# Altium PCB 2SiPM_PCB.PcbDoc (part 1 of 2)
Units mm, origin at the board's own origin, x right, y up, seen from the top; angles counter-clockwise.
Board outline 135.3 x 165.7 mm, 2 copper layers (Top Layer, Bottom Layer); 330 components, 151 nets, 821 pads, 138 vias.
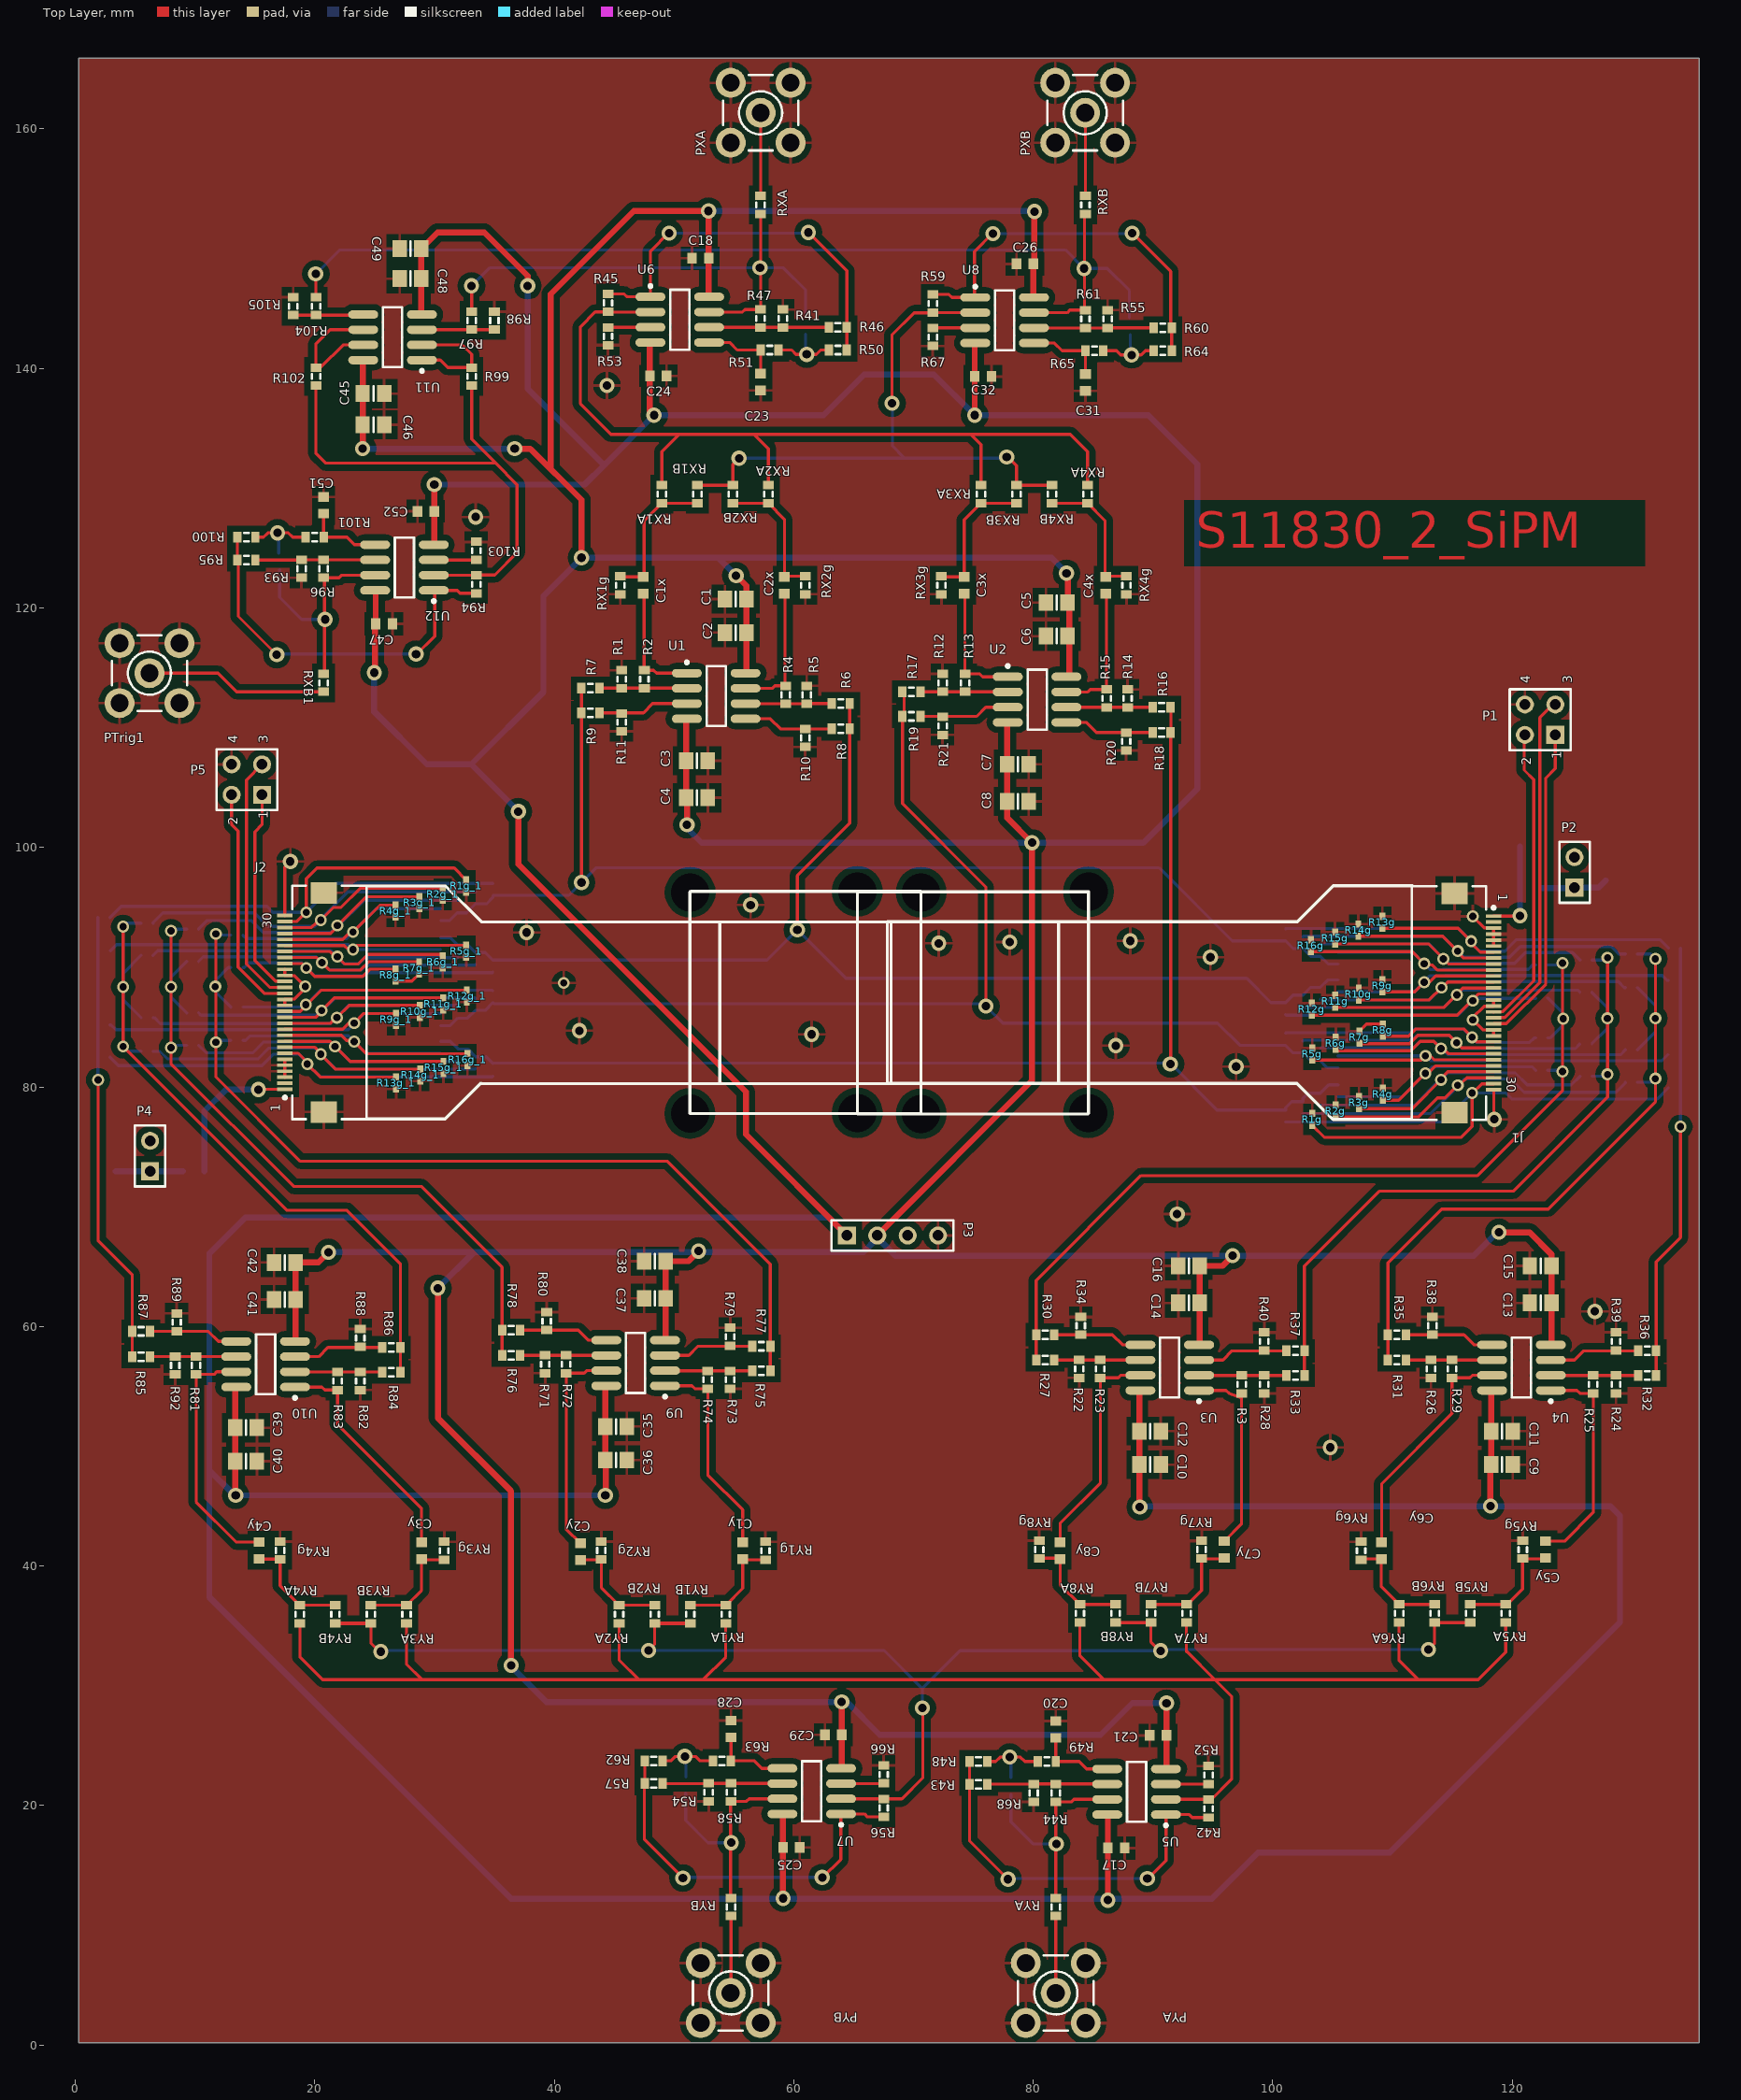
[diagram p0: Top Layer view]
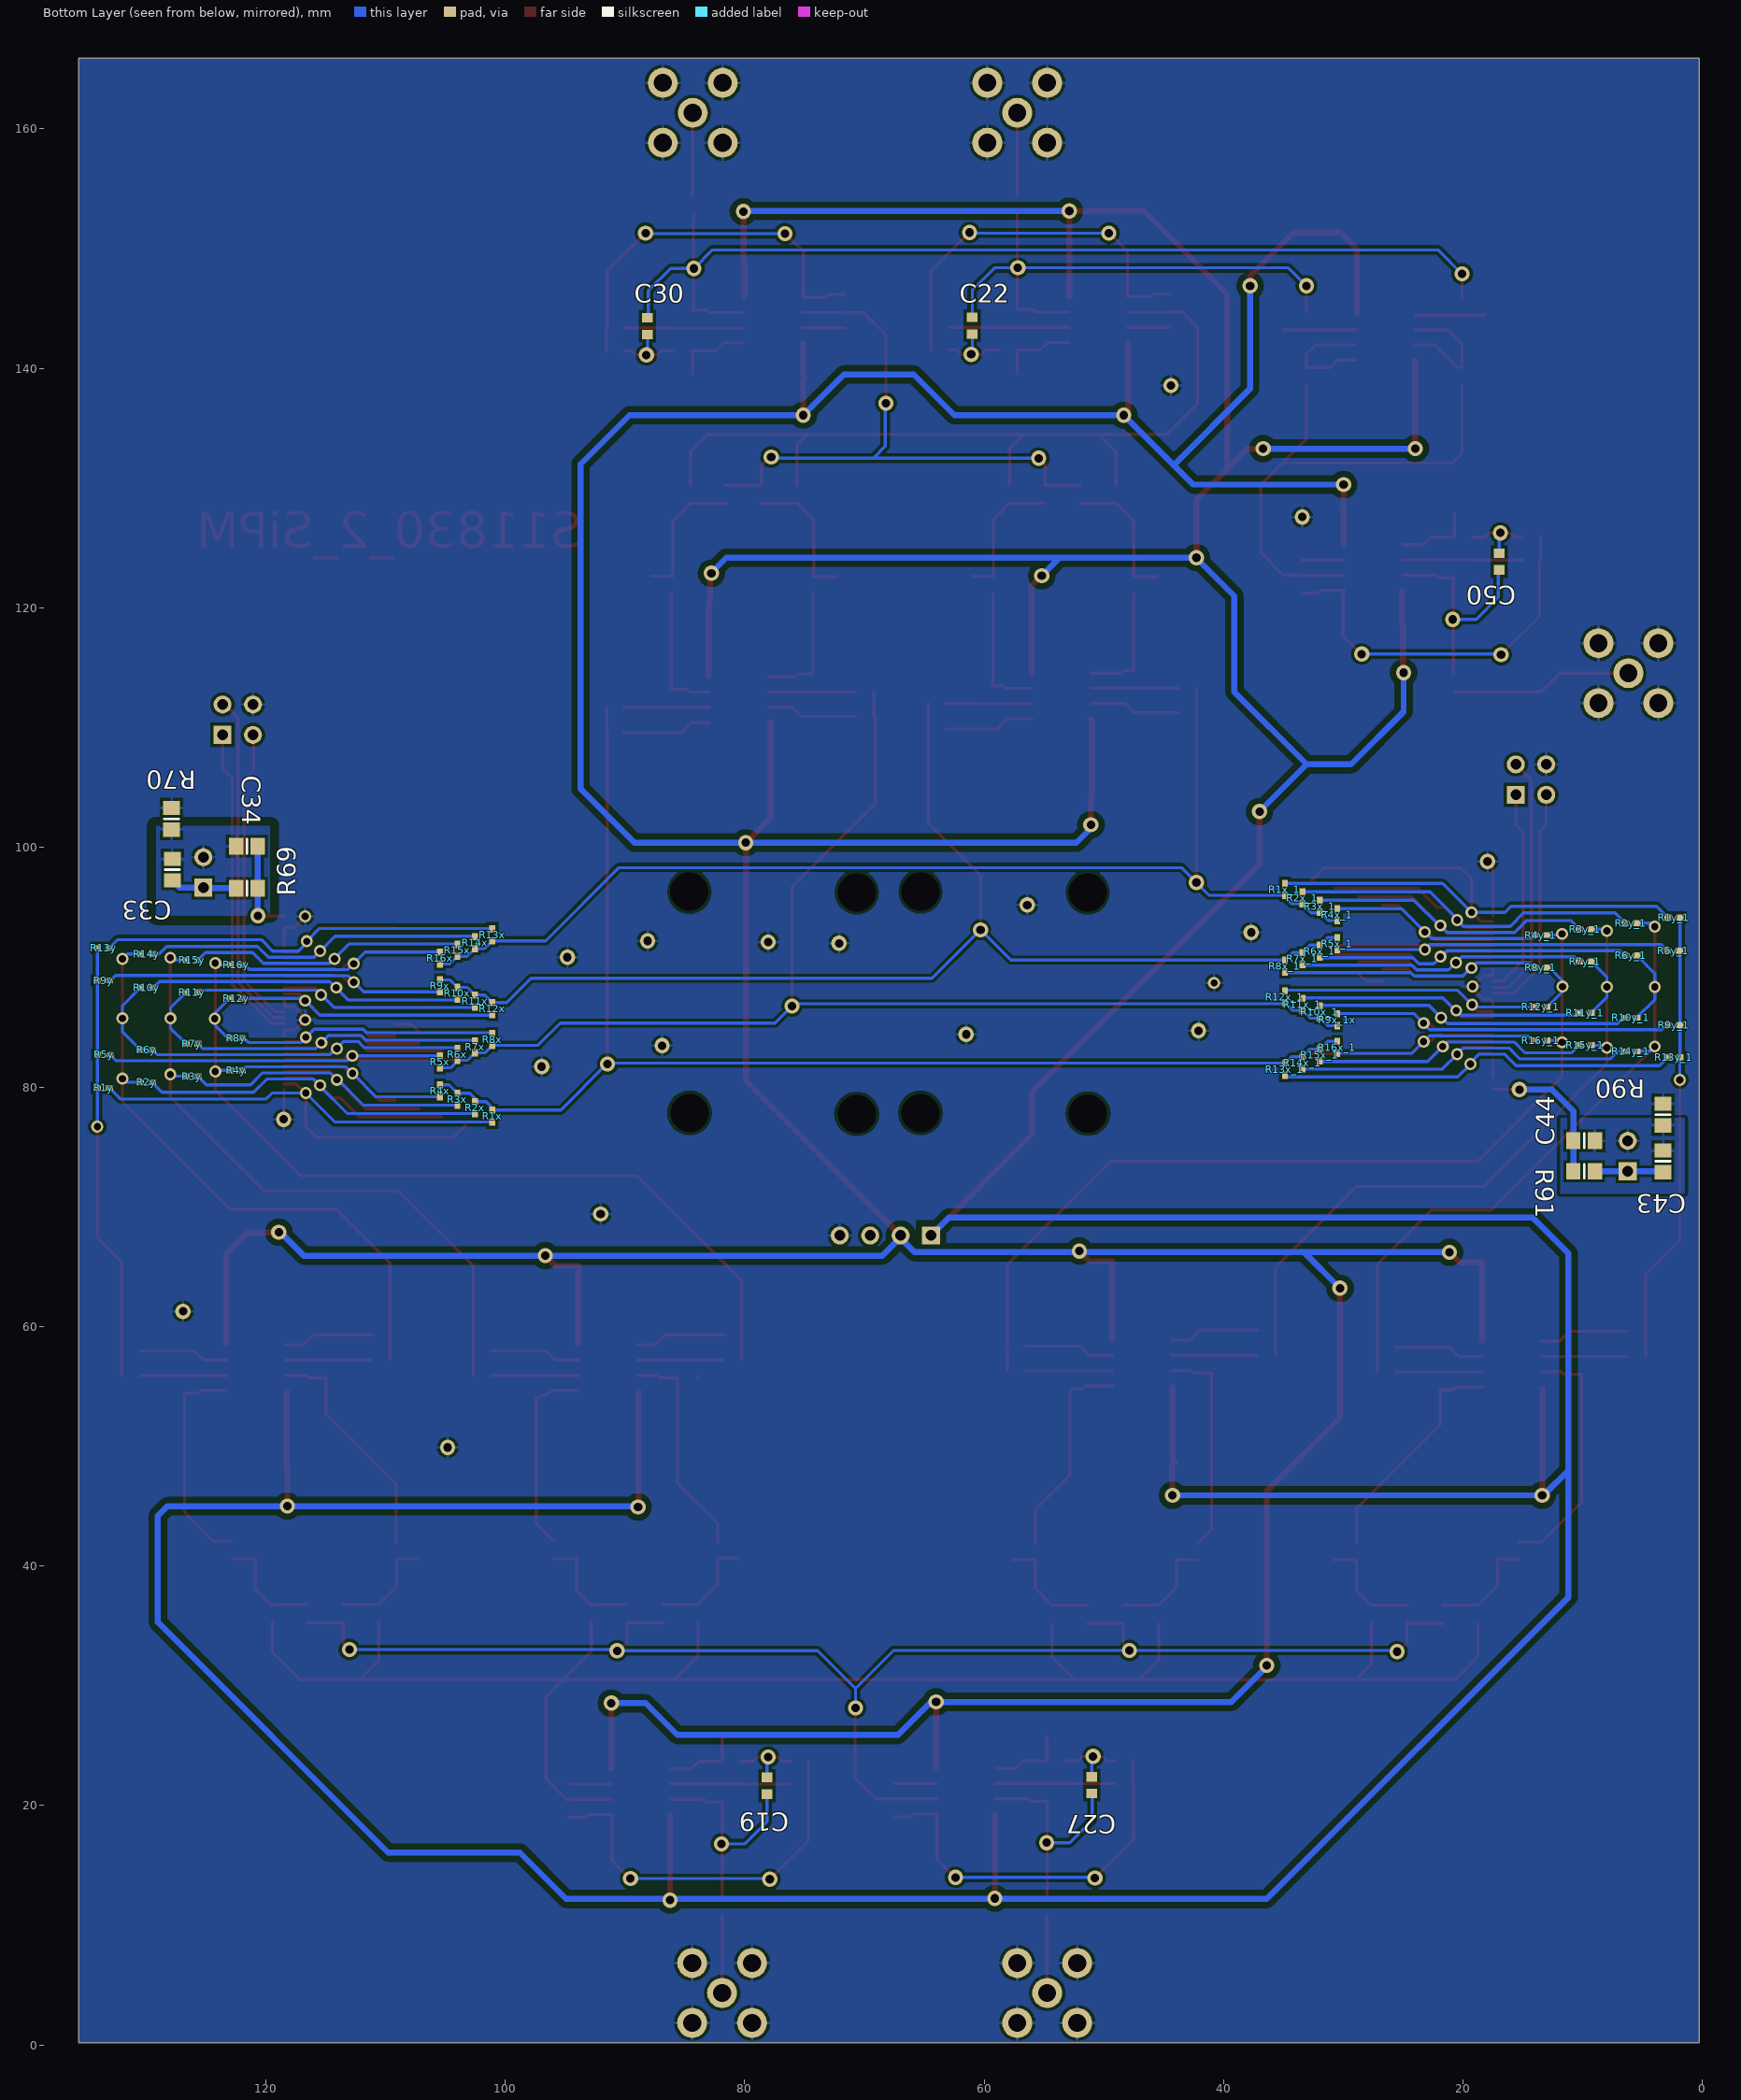
[diagram p1: Bottom Layer view, seen from below]

## Layer stack, top to bottom
Top Layer: signal copper 0.0356
Dielectric: core 0.32, FR-4, Dk 4.8
Bottom Layer: signal copper 0.0356

## Board outline
0.3,0.2 135.6,0.2 135.6,165.9 0.3,165.9

## Design rules (kind name [scope] priority, off if disabled: settings)
Clearance Clearance_7 [InNamedPolygon('gnd_top')] p1: gap=0.5
Clearance Clearance_6 [(InComponent('J2') AND (OnLayer('Bottom Layer')) OR (OnLayer('Top Layer'))OR InComponentClass('Res0402'))] p2: gap=0.2
Clearance Clearance_5 [(InNamedPolygon('gnd_top') OR InNamedPolygon('gnd_bot')) vs InPadClass('Libres')] p3: gap=1.5
Clearance Clearance_4 [InNamedPolygon('gnd_top')] p4: gap=0.5
Clearance Clearance_3 [InNamedPolygon('gnd_bot') vs (InNet('-5') OR InNet('+5')OR OnLayer('Top Layer'))] p5: gap=0.5
Clearance Clearance_2 [InNamedPolygon('70_gnd_bot') vs InNamedPolygon('gnd_bot')] p6: gap=0.75
Clearance Clearance_1 [(InComponent('J1') AND (OnLayer('Bottom Layer')) OR (OnLayer('Top Layer'))OR InComponentClass('Res0402'))] p7: gap=0.2
Clearance [All] p8: gap=0.254
HoleSize HoleSize_1 [InPadClass('Libres')] p1: absolutevalues=TRUE maxlimit=5 minlimit=0.025 maxpercent=80.000 minpercent=20.000
HoleSize [All] p2: absolutevalues=TRUE maxlimit=2.54 minlimit=0.025 maxpercent=80.000 minpercent=20.000
MinimumSolderMaskSliver MinimumSolderMaskSliver_1 [(InComponentClass('Res0402') OR InComponent('J1')OR InComponent('J2'))] p1: minsoldermaskwidth=0.05
MinimumSolderMaskSliver [All] p2: minsoldermaskwidth=0.254
PolygonConnect [All] p1: connectstyle=Relief reliefconductorwidth=0.254 reliefentries=4 polygonreliefangle="90 Angle"
RoutingVias RoutingVias_1 [InNetClass('Undefined')] p1: holewidth=0.6 width=1 viastyle="Through Hole" minholewidth=0.6 minwidth=1 maxholewidth=0.6 maxwidth=1
RoutingVias [All] p2: holewidth=0.711 width=1.27 viastyle="Through Hole" minholewidth=0.711 minwidth=1.27 maxholewidth=0.711 maxwidth=1.27
SilkscreenOverComponentPads [All] p1: minsilkscreentomaskgap=0.254
SolderMaskExpansion SolderMaskExpansion_1 [(InComponent('J1') OR InComponent('J2') OR InComponentClass('Res0402')OR IsVia)] p1: expansion=0.05
SolderMaskExpansion [All] p2: expansion=0.102
Width Width_2 [InNet(GND) And OnLayer('Top Layer')] p1: maxlimit=0.254 minlimit=0.254 preferedwidth=0.254
Width Width_1 [(InNet('-5') OR InNet('+5') OR InNet('+70') OR InNet('+70V_2') OR InNet('+70_2') OR InNet('GND')OR((InNet('+70V') AND OnLayer('Bottom Layer'))))] p2: maxlimit=0.5 minlimit=0.254 preferedwidth=0.5 bottomlayer_minwidth=0.5 minimp=50.000000 maximp=50.000000 favimp=50.000000
Width [All] p3: maxlimit=0.254 minlimit=0.254 preferedwidth=0.254
25 further rules are at their usual default settings.

## Classes and differential pairs
component class 2SiPM_3: C1y C2y C3y C4y C35 C36 C37 C38 C39 C40 C41 C42 C43 C44 J2 P4 P5 R1g_1 R1x_1 R1y_1 R2g_1 R2x_1 R2y_1 R3g_1 R3x_1 R3y_1 R4g_1 R4x_1 R4y_1 R5g_1 R5x_1 R5y_1 R6g_1 R6x_1 R6y_1 R7g_1 R7x_1 R7y_1 R8g_1 R8x_1 R8y_1 R9g_1 R9x_1x R9y_1 R10g_1 R10x_1 R10y_1 R11g_1 R11x_1 R11y_1 R12g_1 R12x_1 R12y_1 R13g_1 R13x_1 R13y_1 R14g_1 R14x_1 R14y_1 R15g_1 R15x_1 R15y_1 R16g_1 R16x_1 R16y_1 R71 R72 R73 R74 R75 R76 R77 R78 R79 R80 R81 R82 R83 R84 R85 R86 R87 R88 R89 R90 R91 R92 RY1A RY1B RY1g RY2A RY2B RY2g RY3A RY3B RY3g RY4A RY4B RY4g U9 U10
component class 2SiPM_2: C1x C2x C3x C4x C5y C6y C7y C8y C17 C18 C19 C20 C21 C22 C23 C24 C25 C26 C27 C28 C29 C30 C31 C32 C33 C34 P1 P2 P3 PXA PXB PYA PYB R41 R42 R43 R44 R45 R46 R47 R48 R49 R50 R51 R52 R53 R54 R55 R56 R57 R58 R59 R60 R61 R62 R63 R64 R65 R66 R67 R68 R69 R70 RX1A RX1B RX1g RX2A RX2B RX2g RX3A RX3B RX3g RX4A RX4B RX4g RXA RXB RY5A RY5B RY5g RY6A RY6B RY6g RY7A RY7B RY7g RY8A RY8B RY8g RYA RYB U5 U6 U7 U8
component class 2SiPM_1: C1 C2 C3 C4 C5 C6 C7 C8 C9 C10 C11 C12 C13 C14 C15 C16 J1 R1 R1g R1x R1y R2 R2g R2x R2y R3 R3g R3x R3y R4 R4g R4x R4y R5 R5g R5x R5y R6 R6g R6x R6y R7 R7g R7x R7y R8 R8g R8x R8y R9 R9g R9x R9y R10 R10g R10x R10y R11 R11g R11x R11y R12 R12g R12x R12y R13 R13g R13x R13y R14 R14g R14x R14y R15 R15g R15x R15y R16 R16g R16x R16y R17 R18 R19 R20 R21 R22 R23 R24 R25 R26 R27 R28 R29 R30 R31 R32 R33 R34 R35 R36 R37 R38 R39 R40 U1 U2 U3 U4
net class Undefined: NetJ1_7 NetJ1_8 NetJ1_9 NetJ1_10 NetJ1_11 NetJ1_12 NetJ1_13 NetJ1_14 NetJ1_17 NetJ1_18 NetJ1_19 NetJ1_22 NetJ1_23 NetJ1_24 NetJ1_25 NetJ1_26 NetJ1_27 NetJ1_28 NetJ1_29 NetJ2_7 NetJ2_8 NetJ2_9 NetJ2_10 NetJ2_11 NetJ2_12 NetJ2_13 NetJ2_14 NetJ2_17 NetJ2_18 NetJ2_19 NetJ2_22 NetJ2_23 NetJ2_24 NetJ2_25 NetJ2_26 NetJ2_27 NetJ2_28 NetJ2_29
component class 2SiPM_4: C45 C46 C47 C48 C49 C50 C51 C52 PTrig1 R93 R94 R95 R96 R97 R98 R99 R100 R101 R102 R103 R104 R105 RXB1 U11 U12

## Components (designator, comment, footprint, x,y, rotation, side; value= is the part's Value field where it differs from the comment)
C1 "Cap" 6-0805_N 55.156,120.75 r0 top
C1x "Cap" 1608[0603] 47.425,121.9 r90 top
C1y "Cap" 1608[0603] 55.733,41.274 r270 top
C2 "Cap Pol3" 6-0805_N 55.156,117.95 r180 top
C2x "Cap" 1608[0603] 59.225,121.9 r90 top
C2y "Cap" 1608[0603] 42.183,41.2 r270 top
C3 "Cap" 6-0805_N 51.925,107.25 r180 top
C3x "Cap" 1608[0603] 74.24,121.9 r90 top
C3y "Cap" 1608[0603] 28.918,41.274 r270 top
C4 "Cap Pol3" 6-0805_N 51.925,104.15 r180 top
C4x "Cap" 1608[0603] 86.04,121.9 r90 top
C4y "Cap" 1608[0603] 15.368,41.3 r270 top
C5 "Cap" 6-0805_N 81.956,120.45 r0 top
C5y "Cap" 1608[0603] 122.781,41.374 r270 top (schematic designator C1y)
C6 "Cap Pol3" 6-0805_N 81.956,117.65 r180 top
C6y "Cap" 1608[0603] 109.064,41.274 r270 top (schematic designator C2y)
C7 "Cap" 6-0805_N 78.725,106.95 r180 top
C7y "Cap" 1608[0603] 95.949,41.374 r270 top (schematic designator C3y)
C8 "Cap Pol3" 6-0805_N 78.725,103.85 r180 top
C8y "Cap" 1608[0603] 82.249,41.274 r270 top (schematic designator C4y)
C9 "Cap" 6-0805_N 119.138,48.465 r180 top
C10 "Cap" 6-0805_N 89.769,48.465 r180 top
C11 "Cap Pol3" 6-0805_N 119.138,51.265 r0 top
C12 "Cap Pol3" 6-0805_N 89.769,51.265 r0 top
C13 "Cap" 6-0805_N 122.369,61.965 r0 top
C14 "Cap" 6-0805_N 93,61.965 r0 top
C15 "Cap Pol3" 6-0805_N 122.369,65.065 r0 top
C16 "Cap Pol3" 6-0805_N 93,65.065 r0 top
C17 "Cap" 1608[0603] 86.931,16.45 r0 top
C18 "Cap" 1608[0603] 52.2,149.2 r180 top
C19 "Cap" 1608[0603] 78.131,21.65 r270 bottom
C20 "Cap" 1608[0603] 81.881,26.35 r90 top
C21 "Cap" 1608[0603] 90.431,25.85 r0 top
C22 "Cap" 1608[0603] 60.985,143.575 r90 bottom
C23 "Cap" 1608[0603] 57.235,138.875 r270 top
C24 "Cap" 1608[0603] 48.685,139.375 r180 top
C25 "Cap" 1608[0603] 59.806,16.5 r0 top
C26 "Cap" 1608[0603] 79.31,148.725 r180 top
C27 "Cap" 1608[0603] 51.006,21.7 r270 bottom
C28 "Cap" 1608[0603] 54.756,26.4 r90 top
C29 "Cap" 1608[0603] 63.306,25.9 r0 top
C30 "Cap" 1608[0603] 88.11,143.525 r90 bottom
C31 "Cap" 1608[0603] 84.36,138.825 r270 top
C32 "Cap" 1608[0603] 75.81,139.325 r180 top
C33 "Cap" 6-0805_N 127.8,98.15 r270 bottom
C34 "Cap" 6-0805_N 121.55,100.1 r180 bottom
C35 "Cap" 6-0805_N 45.169,51.65 r180 top (schematic designator C12)
C36 "Cap Pol3" 6-0805_N 45.169,48.85 r0 top (schematic designator C10)
C37 "Cap" 6-0805_N 48.4,62.35 r0 top (schematic designator C14)
C38 "Cap Pol3" 6-0805_N 48.4,65.45 r0 top (schematic designator C16)
C39 "Cap" 6-0805_N 14.269,51.55 r180 top (schematic designator C12)
C40 "Cap Pol3" 6-0805_N 14.269,48.75 r0 top (schematic designator C10)
C41 "Cap" 6-0805_N 17.5,62.25 r0 top (schematic designator C14)
C42 "Cap Pol3" 6-0805_N 17.5,65.35 r0 top (schematic designator C16)
C43 "Cap" 6-0805_N 3.3,73.8 r270 bottom (schematic designator C33)
C44 "Cap" 6-0805_N 9.9,75.505 r0 bottom (schematic designator C34)
C45 "Cap" 6-0805_N 24.9,137.9 r180 top
C46 "Cap Pol3" 6-0805_N 24.9,135.3 r0 top
C47 "Cap" 1608[0603] 25.79,118.675 r0 top (schematic designator C26)
C48 "Cap" 6-0805_N 28,147.5 r0 top
C49 "Cap Pol3" 6-0805_N 28,150 r0 top
C50 "Cap" 1608[0603] 16.99,123.875 r270 bottom (schematic designator C30)
C51 "Cap" 1608[0603] 20.74,128.575 r90 top (schematic designator C31)
C52 "Cap" 1608[0603] 29.29,128.075 r0 top (schematic designator C32)
J1 "CL586-0556-5" FH12A-30S-0.5SH 116.816,87.019 r270 top
J2 "CL586-0556-5" FH12A-30S-0.5SH 19.134,87.066 r90 top (schematic designator J1)
P1 "Header 2X2" HDR2X2 123.6,109.4 r90 top
P2 "Header 2" HDR1X2 125.2,96.65 r90 top
P3 "Header 4" HDR1X4 64.435,67.6 r0 top
P4 "Header 2" HDR1X2 6.25,72.965 r90 top (schematic designator P2)
P5 "Header 2X2" HDR2X2 15.6,104.4 r90 top
PTrig1 "SMB" SMB_V-RJ45 6.2,114.555 r0 top
PXA "SMB" SMB_V-RJ45 57.235,161.35 r90 top
PXB "SMB" SMB_V-RJ45 84.335,161.35 r90 top
PYA "SMB" SMB_V-RJ45 81.881,4.35 r180 top
PYB "SMB" SMB_V-RJ45 54.731,4.35 r180 top
R1 "Res3" J1-0603 45.625,114.05 r90 top
R1g "Res3" 0402 103.3,77.3 r270 top
R1g_1 "Res3" 0402 32.65,96.785 r90 top (schematic designator R1g)
R1x "Res3" 0402 101.07,77.579 r270 bottom
R1x_1 "Res3" 0402 34.88,96.506 r90 bottom (schematic designator R1x)
R1y "Res3" 0402 133.555,79.931 r180 bottom
R1y_1 "Res3" 0402 2.395,94.154 r0 bottom (schematic designator R1y)
R2 "Res3" J1-0603 47.525,114.05 r270 top
R2g "Res3" 0402 105.267,78 r270 top
R2g_1 "Res3" 0402 30.683,96.085 r90 top (schematic designator R2g)
R2x "Res3" 0402 102.527,78.281 r270 bottom
R2x_1 "Res3" 0402 33.423,95.804 r90 bottom (schematic designator R2x)
R2y "Res3" 0402 129.955,80.4 r180 bottom
R2y_1 "Res3" 0402 5.995,93.685 r0 bottom (schematic designator R2y)
R3 "Res3" J1-0603 97.4,55.165 r90 top
R3g "Res3" 0402 107.2,78.7 r270 top
R3g_1 "Res3" 0402 28.75,95.385 r90 top (schematic designator R3g)
R3x "Res3" 0402 103.984,78.983 r270 bottom
R3x_1 "Res3" 0402 31.966,95.102 r90 bottom (schematic designator R3x)
R3y "Res3" 0402 126.155,80.9 r180 bottom
R3y_1 "Res3" 0402 9.795,93.185 r0 bottom (schematic designator R3y)
R4 "Res3" J1-0603 61.075,112.75 r90 top
R4g "Res3" 0402 109.2,79.4 r270 top
R4g_1 "Res3" 0402 26.75,94.685 r90 top (schematic designator R4g)
R4x "Res3" 0402 105.441,79.685 r270 bottom
R4x_1 "Res3" 0402 30.509,94.4 r90 bottom (schematic designator R4x)
R4y "Res3" 0402 122.45,81.4 r180 bottom
R4y_1 "Res3" 0402 13.5,92.685 r0 bottom (schematic designator R4y)
R5 "Res3" J1-0603 59.325,112.75 r270 top
R5g "Res3" 0402 103.3,82.75 r270 top
R5g_1 "Res3" 0402 32.65,91.335 r90 top (schematic designator R5g)
R5x "Res3" 0402 105.441,82.104 r90 bottom
R5x_1 "Res3" 0402 30.509,91.981 r270 bottom (schematic designator R5x)
R5y "Res3" 0402 133.5,82.7 r180 bottom
R5y_1 "Res3" 0402 2.45,91.385 r0 bottom (schematic designator R5y)
R6 "Res3" J1-0603 63.925,112.015 r180 top
R6g "Res3" 0402 105.267,83.65 r270 top
R6g_1 "Res3" 0402 30.683,90.435 r90 top (schematic designator R6g)
R6x "Res3" 0402 103.984,82.731 r90 bottom
R6x_1 "Res3" 0402 31.966,91.354 r270 bottom (schematic designator R6x)
R6y "Res3" 0402 129.955,83.1 r180 bottom
R6y_1 "Res3" 0402 5.995,90.985 r0 bottom (schematic designator R6y)
R7 "Res3" J1-0603 43.025,113.3 r0 top
R7g "Res3" 0402 107.233,84.15 r270 top
R7g_1 "Res3" 0402 28.717,89.935 r90 top (schematic designator R7g)
R7x "Res3" 0402 102.527,83.358 r90 bottom
R7x_1 "Res3" 0402 33.423,90.727 r270 bottom (schematic designator R7x)
R7y "Res3" 0402 126.15,83.6 r180 bottom
R7y_1 "Res3" 0402 9.8,90.485 r0 bottom (schematic designator R7y)
R8 "Res3" J1-0603 63.925,109.9 r180 top
R8g "Res3" 0402 109.2,84.75 r270 top
R8g_1 "Res3" 0402 26.75,89.335 r90 top (schematic designator R8g)
R8x "Res3" 0402 101.07,83.985 r90 bottom
R8x_1 "Res3" 0402 34.88,90.1 r270 bottom (schematic designator R8x)
R8y "Res3" 0402 122.45,84.1 r180 bottom
R8y_1 "Res3" 0402 13.5,89.985 r0 bottom (schematic designator R8y)
R9 "Res3" J1-0603 43.025,111.25 r0 top
R9g "Res3" 0402 109.15,88.45 r270 top
R9g_1 "Res3" 0402 26.8,85.635 r90 top (schematic designator R9g)
R9x "Res3" 0402 105.441,88.45 r270 bottom
R9x_1x "Res3" 0402 30.509,85.625 r90 bottom
R9y "Res3" 0402 133.55,88.9 r180 bottom
R9y_1 "Res3" 0402 2.4,85.185 r0 bottom (schematic designator R9y)
R10 "Res3" J1-0603 60.956,109.15 r90 top
R10g "Res3" 0402 107.183,87.769 r270 top
R10g_1 "Res3" 0402 28.767,86.316 r90 top (schematic designator R10g)
R10x "Res3" 0402 103.984,87.817 r270 bottom
R10x_1 "Res3" 0402 31.966,86.268 r90 bottom (schematic designator R10x)
R10y "Res3" 0402 129.95,88.3 r180 bottom
R10y_1 "Res3" 0402 6,85.785 r0 bottom (schematic designator R10y)
R11 "Res3" J1-0603 45.625,110.45 r90 top
R11g "Res3" 0402 105.217,87.15 r270 top
R11g_1 "Res3" 0402 30.733,86.935 r90 top (schematic designator R11g)
R11x "Res3" 0402 102.527,87.183 r270 bottom
R11x_1 "Res3" 0402 33.423,86.902 r90 bottom (schematic designator R11x)
R11y "Res3" 0402 126.15,87.9 r180 bottom
R11y_1 "Res3" 0402 9.8,86.185 r0 bottom (schematic designator R11y)
R12 "Res3" J1-0603 72.425,113.75 r90 top
R12g "Res3" 0402 103.25,86.5 r270 top
R12g_1 "Res3" 0402 32.7,87.585 r90 top (schematic designator R12g)
R12x "Res3" 0402 101.07,86.55 r270 bottom
R12x_1 "Res3" 0402 34.88,87.535 r90 bottom (schematic designator R12x)
R12y "Res3" 0402 122.45,87.4 r180 bottom
R12y_1 "Res3" 0402 13.5,86.685 r0 bottom (schematic designator R12y)
R13 "Res3" J1-0603 74.325,113.75 r270 top
R13g "Res3" 0402 109.15,93.75 r270 top
R13g_1 "Res3" 0402 26.8,80.335 r90 top (schematic designator R13g)
R13x "Res3" 0402 101.07,92.7 r90 bottom
R13x_1 "Res3" 0402 34.88,81.475 r270 bottom
R13y "Res3" 0402 133.55,91.6 r0 bottom
R13y_1 "Res3" 0402 2.4,82.485 r180 bottom (schematic designator R13y)
R14 "Res3" J1-0603 87.875,112.45 r90 top
R14g "Res3" 0402 107.15,93.1 r270 top
R14g_1 "Res3" 0402 28.8,80.985 r90 top (schematic designator R14g)
R14x "Res3" 0402 102.527,92.056 r90 bottom
R14x_1 "Res3" 0402 33.423,82.029 r270 bottom (schematic designator R14x)
R14y "Res3" 0402 129.955,91.113 r180 bottom
R14y_1 "Res3" 0402 5.995,82.972 r0 bottom (schematic designator R14y)
R15 "Res3" J1-0603 86.125,112.45 r270 top
R15g "Res3" 0402 105.2,92.45 r270 top
R15g_1 "Res3" 0402 30.75,81.635 r90 top (schematic designator R15g)
R15x "Res3" 0402 103.984,91.413 r90 bottom
R15x_1 "Res3" 0402 31.966,82.672 r270 bottom (schematic designator R15x)
R15y "Res3" 0402 126.155,90.6 r180 bottom
R15y_1 "Res3" 0402 9.795,83.485 r0 bottom (schematic designator R15y)
R16 "Res3" J1-0603 90.725,111.715 r180 top
R16g "Res3" 0402 103.2,91.8 r270 top
R16g_1 "Res3" 0402 32.75,82.285 r90 top (schematic designator R16g)
R16x "Res3" 0402 105.441,90.769 r90 bottom
R16x_1 "Res3" 0402 30.509,83.316 r270 bottom (schematic designator R16x)
R16y "Res3" 0402 122.45,90.2 r180 bottom
R16y_1 "Res3" 0402 13.5,83.885 r0 bottom (schematic designator R16y)
R17 "Res3" J1-0603 69.825,113 r0 top
R18 "Res3" J1-0603 90.725,109.6 r180 top
R19 "Res3" J1-0603 69.825,110.95 r0 top
R20 "Res3" J1-0603 87.756,108.85 r90 top
R21 "Res3" J1-0603 72.425,110.15 r90 top
R22 "Res3" J1-0603 83.85,56.465 r270 top
R23 "Res3" J1-0603 85.6,56.465 r90 top
R24 "Res3" J1-0603 128.669,55.165 r270 top
R25 "Res3" J1-0603 126.769,55.165 r90 top
R26 "Res3" J1-0603 113.219,56.465 r270 top
R27 "Res3" J1-0603 81,57.2 r0 top
R28 "Res3" J1-0603 99.3,55.165 r270 top
R29 "Res3" J1-0603 114.969,56.465 r90 top
R30 "Res3" J1-0603 81,59.315 r0 top
R31 "Res3" J1-0603 110.369,57.2 r0 top
R32 "Res3" J1-0603 131.269,55.915 r180 top
R33 "Res3" J1-0603 101.9,55.915 r180 top
R34 "Res3" J1-0603 83.969,60.065 r270 top
R35 "Res3" J1-0603 110.369,59.315 r0 top
R36 "Res3" J1-0603 131.269,57.965 r180 top
R37 "Res3" J1-0603 101.9,57.965 r180 top
R38 "Res3" J1-0603 113.338,60.065 r270 top
R39 "Res3" J1-0603 128.669,58.765 r270 top
R40 "Res3" J1-0603 99.3,58.765 r270 top
R41 "Res3" J1-0603 59.085,144.175 r90 top
R42 "Res3" J1-0603 94.631,19.75 r90 top
R43 "Res3" J1-0603 75.431,21.785 r180 top
R44 "Res3" J1-0603 81.881,21.05 r90 top
R45 "Res3" J1-0603 44.485,145.475 r270 top
R46 "Res3" J1-0603 63.685,143.44 r0 top
R47 "Res3" J1-0603 57.235,144.175 r270 top
R48 "Res3" J1-0603 75.431,23.685 r180 top
R49 "Res3" J1-0603 81.131,23.685 r180 top
R50 "Res3" J1-0603 63.685,141.54 r0 top
R51 "Res3" J1-0603 57.985,141.54 r0 top
R52 "Res3" J1-0603 94.631,22.55 r90 top
R53 "Res3" J1-0603 44.485,142.675 r270 top
R54 "Res3" J1-0603 52.906,21.1 r270 top
R55 "Res3" J1-0603 86.21,144.125 r90 top
R56 "Res3" J1-0603 67.506,19.8 r90 top
R57 "Res3" J1-0603 48.306,21.835 r180 top
R58 "Res3" J1-0603 54.756,21.1 r90 top
R59 "Res3" J1-0603 71.61,145.425 r270 top
R60 "Res3" J1-0603 90.81,143.39 r0 top
R61 "Res3" J1-0603 84.36,144.125 r270 top
R62 "Res3" J1-0603 48.306,23.735 r180 top
R63 "Res3" J1-0603 54.006,23.735 r180 top
R64 "Res3" J1-0603 90.81,141.49 r0 top
R65 "Res3" J1-0603 85.11,141.49 r0 top
R66 "Res3" J1-0603 67.506,22.6 r90 top
R67 "Res3" J1-0603 71.61,142.625 r270 top
R68 "Res3" J1-0603 80.031,21.05 r270 top
R69 "Res3" 6-0805_N 121.55,96.6 r0 bottom
R70 "Res3" 6-0805_N 127.85,102.4 r270 bottom
R71 "Res3" J1-0603 39.25,56.85 r270 top (schematic designator R22)
R72 "Res3" J1-0603 41,56.85 r90 top (schematic designator R23)
R73 "Res3" J1-0603 54.7,55.55 r270 top (schematic designator R28)
R74 "Res3" J1-0603 52.8,55.55 r90 top (schematic designator R3)
R75 "Res3" J1-0603 57.3,56.3 r180 top (schematic designator R33)
R76 "Res3" J1-0603 36.4,57.585 r0 top (schematic designator R27)
R77 "Res3" J1-0603 57.3,58.35 r180 top (schematic designator R37)
R78 "Res3" J1-0603 36.4,59.7 r0 top (schematic designator R30)
R79 "Res3" J1-0603 54.7,59.15 r270 top (schematic designator R40)
R80 "Res3" J1-0603 39.369,60.45 r270 top (schematic designator R34)
R81 "Res3" J1-0603 10.1,56.75 r90 top (schematic designator R23)
R82 "Res3" J1-0603 23.8,55.45 r270 top (schematic designator R28)
R83 "Res3" J1-0603 21.9,55.45 r90 top (schematic designator R3)
R84 "Res3" J1-0603 26.4,56.2 r180 top (schematic designator R33)
R85 "Res3" J1-0603 5.5,57.485 r0 top (schematic designator R27)
R86 "Res3" J1-0603 26.4,58.25 r180 top (schematic designator R37)
R87 "Res3" J1-0603 5.5,59.6 r0 top (schematic designator R30)
R88 "Res3" J1-0603 23.8,59.05 r270 top (schematic designator R40)
R89 "Res3" J1-0603 8.469,60.35 r270 top (schematic designator R34)
R90 "Res3" 6-0805_N 3.3,77.7 r270 bottom (schematic designator R70)
R91 "Res3" 6-0805_N 9.9,72.965 r180 bottom (schematic designator R69)
R92 "Res3" J1-0603 8.35,56.75 r270 top (schematic designator R22)
R93 "Res3" J1-0603 18.89,123.275 r270 top (schematic designator R55)
R94 "Res3" J1-0603 33.49,121.975 r90 top (schematic designator R59)
R95 "Res3" J1-0603 14.29,124.01 r180 top (schematic designator R60)
R96 "Res3" J1-0603 20.74,123.275 r90 top (schematic designator R61)
R97 "Res3" J1-0603 33.1,144 r270 top
R98 "Res3" J1-0603 35,144 r270 top
R99 "Res3" J1-0603 33.1,139.325 r90 top
R100 "Res3" J1-0603 14.29,125.91 r180 top (schematic designator R64)
R101 "Res3" J1-0603 19.99,125.91 r180 top (schematic designator R65)
R102 "Res3" J1-0603 20.1,139.325 r90 top
R103 "Res3" J1-0603 33.49,124.775 r90 top (schematic designator R67)
R104 "Res3" J1-0603 20.1,145.2 r270 top
R105 "Res3" J1-0603 18.2,145.2 r270 top
RX1A "Res3" J1-0603 48.985,129.5 r270 top
RX1B "Res3" J1-0603 51.952,129.5 r270 top
RX1g "Res3" J1-0603 45.525,121.9 r90 top
RX2A "Res3" J1-0603 57.885,129.5 r270 top
RX2B "Res3" J1-0603 54.918,129.5 r270 top
RX2g "Res3" J1-0603 60.975,121.9 r90 top
RX3A "Res3" J1-0603 75.64,129.5 r270 top
RX3B "Res3" J1-0603 78.607,129.5 r270 top
RX3g "Res3" J1-0603 72.34,121.9 r90 top
RX4A "Res3" J1-0603 84.54,129.5 r270 top
RX4B "Res3" J1-0603 81.573,129.5 r270 top
RX4g "Res3" J1-0603 87.79,121.9 r90 top
RXA "Res3" J1-0603 57.235,153.65 r270 top
RXB "Res3" J1-0603 84.36,153.65 r270 top
RXB1 "Res3" J1-0603 20.74,113.75 r90 top (schematic designator RXB)
RY1A "Res3" J1-0603 54.318,35.974 r90 top
RY1B "Res3" J1-0603 51.351,35.974 r90 top
RY1g "Res3" J1-0603 57.633,41.274 r270 top
RY2A "Res3" J1-0603 45.418,35.974 r90 top
RY2B "Res3" J1-0603 48.385,35.974 r90 top
RY2g "Res3" J1-0603 43.933,41.3 r270 top
RY3A "Res3" J1-0603 27.663,35.974 r90 top
RY3B "Res3" J1-0603 24.696,35.974 r90 top
RY3g "Res3" J1-0603 30.818,41.274 r270 top
RY4A "Res3" J1-0603 18.763,35.974 r90 top
RY4B "Res3" J1-0603 21.73,35.974 r90 top
RY4g "Res3" J1-0603 17.118,41.3 r270 top
RY5A "Res3" J1-0603 119.449,36.048 r90 top (schematic designator RY1A)
RY5B "Res3" J1-0603 116.482,36.048 r90 top (schematic designator RY1B)
RY5g "Res3" J1-0603 120.881,41.374 r270 top (schematic designator RY1g)
RY6A "Res3" J1-0603 110.549,36.048 r90 top (schematic designator RY2A)
RY6B "Res3" J1-0603 113.516,36.048 r90 top (schematic designator RY2B)
RY6g "Res3" J1-0603 107.381,41.274 r270 top (schematic designator RY2g)
RY7A "Res3" J1-0603 92.794,36.048 r90 top (schematic designator RY3A)
RY7B "Res3" J1-0603 89.827,36.048 r90 top (schematic designator RY3B)
RY7g "Res3" J1-0603 94.049,41.374 r270 top (schematic designator RY3g)
RY8A "Res3" J1-0603 83.894,36.048 r90 top (schematic designator RY4A)
RY8B "Res3" J1-0603 86.861,36.048 r90 top (schematic designator RY4B)
RY8g "Res3" J1-0603 80.499,41.374 r270 top (schematic designator RY4g)
RYA "Res3" J1-0603 81.881,11.525 r90 top
RYB "Res3" J1-0603 54.756,11.525 r90 top
U1 "AD8002" SO-8_M 53.525,112.65 r0 top
U2 "AD8002" SO-8_M 80.325,112.35 r0 top
U3 "AD8002" SO-8_M 91.4,56.565 r180 top (schematic designator U1)
U4 "AD8002" SO-8_M 120.769,56.565 r180 top
U5 "AD8056ARM" SO8_M 88.631,21.15 r180 top
U6 "AD8056ARM" SO8_M 50.485,144.075 r0 top
U7 "AD8056ARM" SO8_M 61.506,21.2 r180 top
U8 "AD8056ARM" SO8_M 77.61,144.025 r0 top
U9 "AD8002" SO-8_M 46.8,56.95 r180 top (schematic designator U1)
U10 "AD8002" SO-8_M 15.9,56.85 r180 top (schematic designator U1)
U11 "THS4062" SO-8_M 26.5,142.6 r180 top
U12 "THS4062" SO8_M 27.49,123.375 r180 top (schematic designator U8)

## Footprints (in the part's own frame and the unit in brackets; to place one, negate y for a bottom-side part, rotate by r counter-clockwise, add the part's x,y. Pads: shape width x height; smd on the part's side, far side on the other; paste and mask are expansions set on the pad)
6-0805_N [mm] "Chip Resistor, Body 2.0x1.2mm, IPC Medium Density"
  rect 1.2x1.4 smd: 1(-0.9,0) 2(0.9,0)
  silkscreen extent 0,-0.6 0,0.6, body extent -1.07,-0.7 1.07,0.7, height 0.7
0402 [mm] "Chip Capacitor, Body 1.0x0.5mm, IPC High Density"
  rect 0.6x0.5 smd: 1(-0.5,0) 2(0.5,0)
  body extent -0.55,-0.3 0.55,0.3, height 1.3
1608[0603] [mm] "Chip Capacitor, Body 1.6x0.8mm, IPC High Density"
  rect 0.8x0.9 smd: 1(-0.7,0) 2(0.7,0)
  body extent -0.87,-0.48 0.87,0.48, height 1.3
FH12A-30S-0.5SH [mm] "Connector; FH12 Series; 30 Position; 0.5mm Spaced Top Contact"
  rect 0.3x1.3 smd: 1(-7.25,1.625) 2(-6.75,1.625) 3(-6.25,1.625) 4(-5.75,1.625) 5(-5.25,1.625) 6(-4.75,1.625) 7(-4.25,1.625) 8(-3.75,1.625) 9(-3.25,1.625) 10(-2.75,1.625) 11(-2.25,1.625) 12(-1.75,1.625) 13(-1.25,1.625) 14(-0.75,1.625) 15(-0.25,1.625) 16(0.25,1.625) 17(0.75,1.625) 18(1.25,1.625) 19(1.75,1.625) 20(2.25,1.625) 21(2.75,1.625) 22(3.25,1.625) 23(3.75,1.625) 24(4.25,1.625) 25(4.75,1.625) 26(5.25,1.625) 27(5.75,1.625) 28(6.25,1.625) 29(6.75,1.625) 30(7.25,1.625)
  rect 1.8x2.2 smd: 31(-9.15,-1.625) 32(9.15,-1.625)
  silkscreen extent -9.75,-5.2 9.75,1.75
HDR1X2 [mm] "Connector; Header; 2 Position"
  rect 1.5x1.5 hole 0.9: 1(0,0)
  round 1.5 hole 0.9: 2(2.54,0)
  silkscreen extent -1.27,-1.27 3.81,1.27
HDR1X4 [mm] "Connector; Header; 4 Position"
  rect 1.5x1.5 hole 0.9: 1(0,0)
  round 1.5 hole 0.9: 2(2.54,0) 3(5.08,0) 4(7.62,0)
  silkscreen extent -1.27,-1.27 8.89,1.27
HDR2X2 [mm] "Connector; Header; 2x2 Position"
  rect 1.5x1.5 hole 0.9: 1(0,0)
  round 1.5 hole 0.9: 2(0,2.54) 3(2.54,0) 4(2.54,2.54)
  silkscreen extent -1.27,-1.27 3.81,3.81
J1-0603 [mm] "Chip Resistor, Body 1.6x0.8mm, IPC High Density"
  rect 0.7x0.9 smd: 1(-0.75,0) 2(0.75,0)
  silkscreen extent -0.2,-0.35 0.2,0.35, body extent -0.85,-0.48 0.85,0.48, height 0.9
SMB_V-RJ45 [mm] "Connector; SMB Straight"
  round 2.5 hole 1.5: 1(0,0) 2(-2.5,-2.5) 2(-2.5,2.5) 2(2.5,-2.5) 2(2.5,2.5)
  silkscreen extent -3.15,-3.15 3.15,3.15
SO8_M [mm] "SOIC, 8-Leads, Body 4.9x3.9mm, Pitch 1.27mm, IPC Low Density"
  oval 2.5x0.7 smd: 1(-2.45,1.905) 2(-2.45,0.635) 3(-2.45,-0.635) 4(-2.45,-1.905) 5(2.45,-1.905) 6(2.45,-0.635) 7(2.45,0.635) 8(2.45,1.905)
  silkscreen extent -2.58,-2.5 0.8,2.93, body extent -2,-2.5 2,2.5, height 1.75
SO-8_M [mm] "SOIC, 8-Leads, Body 4.9x3.9mm, Pitch 1.27mm, IPC Low Density"
  oval 2.5x0.7 smd: 1(-2.45,1.905) 2(-2.45,0.635) 3(-2.45,-0.635) 4(-2.45,-1.905) 5(2.45,-1.905) 6(2.45,-0.635) 7(2.45,0.635) 8(2.45,1.905)
  silkscreen extent -2.57,-2.5 0.8,2.93, body extent -2,-2.5 2,2.5, height 1.75

## Part data
C1 C1x C1y C2x C2y C3 C3x C3y C4x C4y C5 C5y C6y C7 C7y C8y C9 C10 C13 C14 C17 C18 C19 C20 C21 C22 C23 C24 C25 C26 C27 C28 C29 C30 C31 C32 C33 C34 C35 C37 C39 C41 C43 C44 C45 C47 C48 C50 C51 C52: "Capacitor"
C2 C4 C6 C8 C11 C12 C15 C16 C36 C38 C40 C42 C46 C49: "Polarized Capacitor (Surface Mount)"
J1 J2: "FH12 Series, \"Flip-Lock\" SMT/ZIF FFC/FPC Connector - 0.5mm Spaced Top Contact"
P1 P5: "Header, 2-Pin, Dual row"
P2 P4: "Header, 2-Pin"
P3: "Header, 4-Pin"
PTrig1 PXA PXB PYA PYB: "SMB Straight Connector"
R1 R1g R1g_1 R1x R1x_1 R1y R1y_1 R2 R2g R2g_1 R2x R2x_1 R2y R2y_1 R3 R3g R3g_1 R3x R3x_1 R3y R3y_1 R4 R4g R4g_1 R4x R4x_1 R4y R4y_1 R5 R5g R5g_1 R5x R5x_1 R5y R5y_1 R6 R6g R6g_1 R6x R6x_1 R6y R6y_1 R7 R7g R7g_1 R7x R7x_1 R7y R7y_1 R8 R8g R8g_1 R8x R8x_1 R8y R8y_1 R9 R9g R9g_1 R9x R9x_1x R9y R9y_1 R10 R10g R10g_1 R10x R10x_1 R10y R10y_1 R11 R11g R11g_1 R11x R11x_1 R11y R11y_1 R12 R12g R12g_1 R12x R12x_1 R12y R12y_1 R13 R13g R13g_1 R13x R13x_1 R13y R13y_1 R14 R14g R14g_1 R14x R14x_1 R14y R14y_1 R15 R15g R15g_1 R15x R15x_1 R15y R15y_1 R16 R16g R16g_1 R16x R16x_1 R16y R16y_1 R17 R18 R19 R20 R21 R22 R23 R24 R25 R26 R27 R28 R29 R30 R31 R32 R33 R34 R35 R36 R37 R38 R39 R40 R41 R42 R43 R44 R45 R46 R47 R48 R49 R50 R51 R52 R53 R54 R55 R56 R57 R58 R59 R60 R61 R62 R63 R64 R65 R66 R67 R68 R69 R70 R71 R72 R73 R74 R75 R76 R77 R78 R79 R80 R81 R82 R83 R84 R85 R86 R87 R88 R89 R90 R91 R92 R93 R94 R95 R96 R97 R98 R99 R100 R101 R102 R103 R104 R105 RX1A RX1B RX1g RX2A RX2B RX2g RX3A RX3B RX3g RX4A RX4B RX4g RXA RXB RXB1 RY1A RY1B RY1g RY2A RY2B RY2g RY3A RY3B RY3g RY4A RY4B RY4g RY5A RY5B RY5g RY6A RY6B RY6g RY7A RY7B RY7g RY8A RY8B RY8g RYA RYB: "Resistor"
U1 U2 U3 U4 U9 U10 U11: library part AD8002AR, "Dual 600MHz, 50mW Current Feedback Amplifier"
U5 U6 U7 U8: "Low Cost, 300MHz Voltage Feedback Amplifier"
U12: library part AD8056ARM, "Low Cost, 300MHz Voltage Feedback Amplifier"

## Free pads (board coordinates)
  round 1.524 hole 3.2 unplated: T1(51.35,96.25) T1(84.6,77.835) T2(51.334,77.785) T2(84.616,96.3) T3(65.316,96.335) T3(70.634,77.75) T4(65.316,77.835) T4(70.634,96.25)

## Via types
v1: diameter 1.27, hole 0.711, Top Layer to Bottom Layer, 82 vias
v2: diameter 1, hole 0.6, Top Layer to Bottom Layer, 56 vias

## Nets (pads, with @x,y where several pads share a name; then routed paths per layer and width w, separated by ;. In a path a pad name is that pad's centre, name@x,y a point inside that pad or via, vN(x,y) a via of type N, cw(c..) or ccw(c..) an arc to the next point about the centre after c; other vN are vias at no path point)
70_GND: C33.1 C34.1 P2.2 R70.2
70_GND_2: C43.1 C44.1 P4.2 R90.2
+5: C1.2 C2.1 C5.2 C6.1 C9.2 C10.2 C11.1 C12.1 C17.1 C18.1 C25.1 C26.1 C35.2 C36.1 C39.2 C40.1 C45.2 C46.1 C47.1 P3.1 U1.8 U2.8 U3.8 U4.8 U5.8 U6.8 U7.8 U8.8 U9.8 U10.8 U11.8 U12.8 | length 615.2
  Top Layer w0.5: U10.8@13.369,54.864 C40.1@13.369,48.75 13.369,46.084 13.185,45.9 v1(13.4,45.9) ; v1(24,133.3) C46.1@24,135.3 U11.8@24,140.645 ; v1@25.025,114.95 25.025,118.61 C47.1@25.09,118.675 U12.8@25.09,121.42 ; v1@36.7,133.6 37,133.3 38,133.3 42.275,129.025 v1(42.275,124.2) ; v1(37,103) 37,98.6 56,79.6 56,76.035 P3.1@64.435,67.6 ; 39.7,131.8 39.7,146.2 46.65,153.15 v1(52.885,153.15) U6.8@52.885,146.03 ; C36.1@44.085,48.666 44.3,48.451 44.3,45.685 44.085,45.9 v1(44.269,45.9) ; C36.1@44.269,48.85 U9.8@44.269,54.964 ; v1@55.2,122.7 56.056,121.844 C1.2@56.056,120.75 C2.1@56.056,117.95 56.056,114.636 U1.8@55.975,114.555 ; v1(59.106,12.25) C25.1@59.106,16.5 U7.8@59.106,19.245 ; U8.8@80.01,145.98 C26.1@80.01,148.725 80.075,148.79 80.075,152.45 ; v1(82.775,122.9) 82.685,122.9 82.9,122.685 82.9,120.556 83.006,120.45 U2.8@83.006,114.336 ; v1@86.231,12.15 C17.1@86.231,16.45 U5.8@86.231,19.195 ; v1@88.869,45 C10.2@88.869,48.465 C12.1@88.869,51.265 U3.8@88.869,54.579 ; v1(118.185,45) 118.185,48.412 C9.2@118.238,48.465 C11.1@118.238,51.265 U4.8@118.238,54.579
  Bottom Layer w0.5: v1@24,133.6 24.3,133.3 36.385,133.3 36.685,133.6 36.7,133.585 v1(36.7,133.3) ; v1(24.965,114.6) 24.965,111.335 29.36,106.94 33.06,106.94 ; v1(37,103) 33.06,106.94 ; v1(44.269,45.9) v1(13.4,45.9) 13.3,45.9 11.2,48 ; v1(52.885,153.15) 79.785,153.15 80.1,152.835 v1(80.1,153.1) ; v1(55.185,122.7) 53.685,124.2 ; P3.1@64.435,67.6 62.935,69.1 14.2,69.1 11.2,66.1 11.2,48 ; v1@82.7,122.9 82.7,123.031 81.531,124.2 53.685,124.2 ; v1@88.9,45 128.2,45 129,44.2 129,35.3 109.765,16.065 98.765,16.065 94.9,12.2 36.4,12.2 11.2,37.4 11.2,48 ; 33.06,106.94 39.1,112.98 39.1,121 42.3,124.2 53.685,124.2
  other v1: 86.231,12.1 88.9,44.931
+70: C33.2 P2.1 R69.2 | length 5.5
  Bottom Layer w0.5: R69.2@122.45,96.6 P2.1@125.15,96.6 ; P2.1@125.2,96.65 127.2,96.65 C33.2@127.8,97.25
+70_2: C43.2 P4.1 R91.2 | length 5.6
  Bottom Layer w0.5: C43.2@3.365,72.965 P4.1@6.25,72.965 R91.2@9,72.965
+70V: C34.2 J1.1 R69.1 | length 8
  Top Layer w0.254: J1.1@118.441,94.269 120.619,94.269 v1(120.65,94.3)
  Bottom Layer w0.5: v1(120.65,94.3) R69.1@120.65,96.6 C34.2@120.65,100.1
+70V_2: C44.2 J2.1 R91.1 | length 12.4
  Top Layer w0.254: v1@15.331,79.816 J2.1@17.509,79.816
  Bottom Layer w0.5: R91.1@10.8,72.965 C44.2@10.8,75.505 10.8,77.985 12.6,79.785 v1(15.3,79.785)
-5: C3.2 C4.2 C7.2 C8.2 C13.2 C14.2 C15.2 C16.2 C21.2 C24.2 C29.2 C32.2 C37.2 C38.2 C41.2 C42.2 C48.2 C49.2 C52.2 P3.2 U1.4 U2.4 U3.4 U4.4 U5.4 U6.4 U7.4 U8.4 U9.4 U10.4 U11.4 U12.4 | length 502.9
  Top Layer w0.5: U10.4@18.4,58.805 C41.2@18.4,62.25 C42.2@18.4,65.35 20.3,65.35 v1(21.15,66.2) ; U11.4@28.9,144.555 C48.2@28.9,147.5 C49.2@28.9,150 30.25,151.35 34.15,151.35 37.785,147.715 v1(37.785,146.9) ; U12.4@29.99,125.33 C52.2@29.99,128.075 ; v1@29.99,130.3 C52.2@29.99,128.075 ; C52.2@30.115,128.2 C52.2@29.99,128.075 ; v1@30.285,63.1 30.285,52.365 36.4,46.25 v1(36.4,31.7) ; U6.4@47.985,142.12 C24.2@47.985,139.375 47.985,136.1 v1(48.335,136.1) ; U9.4@49.3,58.905 C37.2@49.3,62.35 C38.2@49.3,65.45 51.2,65.45 v1(52.05,66.3) ; U1.4@51.075,110.745 51.025,110.695 C3.2@51.025,107.25 C4.2@51.025,104.15 51.085,104.09 v1(51.085,101.9) ; U7.4@64.006,23.155 C29.2@64.006,25.9 v1(64.006,28.65) v1@64.006,28.7 ; P3.2@66.975,67.6 79.9,80.525 v1(79.9,100.4) 77.825,102.475 C8.2@77.825,103.85 C7.2@77.825,106.95 77.825,110.395 U2.4@77.875,110.445 ; C32.2@74.985,139.2 C32.2@75.11,139.325 ; v1(75.11,136.1) C32.2@75.11,139.325 ; U8.4@75.11,142.07 C32.2@75.11,139.325 ; U5.4@91.131,23.105 C21.2@91.131,25.85 v1@91.131,28.65 ; U3.4@93.9,58.52 C14.2@93.9,61.965 C16.2@93.9,65.065 95.8,65.065 v1(96.65,65.915) ; v1(118.9,67.865) 121.441,67.865 123.269,66.036 C15.2@123.269,65.065 C13.2@123.269,61.965 U4.4@123.269,58.52
  Bottom Layer w0.5: v1(21.15,66.2) 33.285,66.2 ; v1@30,130.3 42.535,130.3 44.168,131.932 ; v1(30.285,63.2) 33.285,66.2 ; 33.3,66.215 33.285,66.2 ; v1@36.5,31.5 39.35,28.65 v1(64.006,28.65) 64.431,28.65 67.181,25.9 85.631,25.9 88.281,28.55 v1(91.131,28.55) ; v1@37.8,147.1 37.8,138.3 44.168,131.932 ; v1@51.1,102 51.1,101.6 52.3,100.4 v1(79.9,100.4) 89.2,100.4 93.7,104.9 93.7,132 89.6,136.1 v1(75.11,136.1) 71.71,139.5 65.885,139.5 62.485,136.1 v1(48.335,136.1) 44.168,131.932 ; P3.2@66.975,67.6 67.087,67.487 P3.2@67,67.4 ; v1@118.85,67.915 v1(118.9,67.865) ; v1@119.05,67.765 119,67.765 v1(118.9,67.865) ; 33.285,66.2 65.8,66.2 P3.2@67,67.4 ; P3.2@67,67.4 68.485,65.915 v1(96.65,65.915) 116.815,65.915 118.765,67.865 v1(118.9,67.865)
  other v1: 29.985,130.3
GND: C1.1 C2.2 C3.1 C4.1 C5.1 C6.2 C7.1 C8.1 C9.1 C10.1 C11.2 C12.2 C13.1 C14.1 C15.1 C16.1 C17.2 C18.2 C20.2 C21.1 C23.2 C24.1 C25.2 C26.2 C28.2 C29.1 C31.2 C32.1 C35.1 C36.2 C37.1 C38.1 C39.1 C40.2 C41.1 C42.1 C45.1 C46.2 C47.2 C48.1 C49.1 C51.2 C52.1 J1.3 J1.4 J1.5 J1.6 J1.15 J1.16 J1.20 J1.21 J1.30 J1.31 J1.32 J2.3 J2.4 J2.5 J2.6 J2.15 J2.16 J2.20 J2.21 J2.30 J2.31 J2.32 P1.4 P3.4 P5.4 PTrig1.2 PXA.2 PXB.2 PYA.2 PYB.2 R1.2 R1g.1 R1g_1.1 R2g.1 R2g_1.1 R3g.1 R3g_1.1 R4.2 R4g.1 R4g_1.1 R5g.1 R5g_1.1 R6g.1 R6g_1.1 R7g.1 R7g_1.1 R8g.1 R8g_1.1 R9g.1 R9g_1.1 R10.1 R10g.1 R10g_1.1 R11.1 R11g.1 R11g_1.1 R12.2 R12g.1 R12g_1.1 R13g.1 R13g_1.1 R14.2 R14g.1 R14g_1.1 R15g.1 R15g_1.1 R16g.1 R16g_1.1 R20.1 R21.1 R22.2 R24.2 R26.2 R28.2 R34.1 R38.1 R39.1 R40.1 R41.2 R52.2 R53.2 R54.2 R55.2 R66.2 R67.2 R68.2 R70.1 R71.2 R73.2 R79.1 R80.1 R82.2 R88.1 R89.1 R90.1 R92.2 R93.2 R98.1 R103.2 R105.1 RX1g.1 RX2g.1 RX3g.1 RX4g.1 RY1g.1 RY2g.1 RY3g.1 RY4g.1 RY5g.1 RY6g.1 RY7g.1 RY8g.1 | length 27.7
  Top Layer w0.254: J2.3@17.509,80.816 J2.4@17.509,81.316 J2.5@17.509,81.816 J2.6@17.509,82.316 ; J2.15@17.509,86.816 J2.16@17.509,87.316 17.532,87.339 18.294,87.339 19.205,88.25 v2(19.205,88.39) 18.296,89.3 17.525,89.3 J2.20@17.509,89.316 J2.21@17.509,89.816 ; J2.30@17.509,94.316 17.509,98.383 v1(17.961,98.835) ; R8g_1.1@26.75,88.835 28.117,88.835 R7g_1.1@28.717,89.435 ; R22.2@83.85,55.715 R22.2@83.9,55.665 ; R7g.1@107.233,84.65 107.833,85.25 R8g.1@109.2,85.25 ; v2(116.7,94.25) 116.7,94.248 117.656,93.292 118.418,93.292 J1.3@118.441,93.269 J1.4@118.441,92.769 J1.5@118.441,92.269 J1.6@118.441,91.769 ; J1.30@118.441,79.769 118.46,79.75 118.46,77.34 v1(118.5,77.3) v1@118.6,77.2 ; J1.21@118.441,84.269 J1.20@118.441,84.769 117.531,84.769 v2(116.7,85.6) 116.7,85.79 117.656,86.746 118.418,86.746 J1.16@118.441,86.769 J1.15@118.441,87.269
  other v1: 104.8,49.9 126.9,61.265 92.022,69.4 96.946,81.7 86.9,83.455 61.5,84.4 42.1,84.7 94.8,90.832 72.113,92 78.031,92.1 88.11,92.2 37.7,92.9 56.4,95.2 33.434,127.6 44.4,138.575
  other v2: 40.8,88.687
NetC1x_1: C1x.1 R2.1 U1.1 | length 10.1
  Top Layer w0.254: C1x.1@47.45,121.2 47.5,121.15 47.5,114.8 48.3,114.8 48.545,114.555 U1.1@51.075,114.555
NetC1x_2: C1x.2 RX1A.2 RX1B.2 RX1g.2 | length 11.5
  Top Layer w0.254: RX1g.2@45.525,122.65 45.575,122.6 C1x.2@47.425,122.6 ; C1x.2@47.57,122.745 47.5,122.815 47.5,127.265 RX1A.2@48.985,128.75 RX1B.2@51.952,128.75
NetC1y_1: C1y.1 R74.1 U9.1 | length 17.6
  Top Layer w0.254: U9.1@49.25,55.045 51.5,55.045 51.745,54.8 R74.1@52.8,54.8 ; R74.1@52.825,54.6 52.825,47.608 55.733,44.7 C1y.1@55.733,41.874
NetC1y_2: C1y.2 RY1A.2 RY1B.2 RY1g.2 | length 9.3
  Top Layer w0.254: RY1B.2@51.351,36.724 RY1A.2@54.318,36.724 55.733,38.139 C1y.2@55.733,40.574 ; C1y.2@55.783,40.524 RY1g.2@57.633,40.524
NetC2x_1: C2x.1 R5.1 U1.7 | length 11.2
  Top Layer w0.254: U1.7@55.975,113.285 58.2,113.285 58.415,113.5 R5.1@59.325,113.5 59.275,113.55 59.275,121.15 C2x.1@59.225,121.2
NetC2x_2: C2x.2 RX2A.2 RX2B.2 RX2g.2 | length 11.4
  Top Layer w0.254: RX2B.2@54.918,128.75 RX2A.2@57.885,128.75 59.225,127.41 C2x.2@59.225,122.6 59.275,122.65 RX2g.2@60.975,122.65
NetC2y_1: C2y.1 R72.1 U9.7 | length 18.1
  Top Layer w0.254: C2y.1@42.183,41.9 41,43.083 R72.1@41,56.1 42.5,56.1 42.715,56.315 U9.7@44.35,56.315
NetC2y_2: C2y.2 RY2A.2 RY2B.2 RY2g.2 | length 9.2
  Top Layer w0.254: C2y.2@42.183,40.524 43.883,40.524 43.933,40.574 43.933,38.209 RY2A.2@45.418,36.724 RY2B.2@48.385,36.724
NetC3x_1: C3x.1 R13.1 U2.1 | length 10.4
  Top Layer w0.254: C3x.1@74.24,121.2 74.3,121.14 74.3,114.525 R13.1@74.325,114.5 ; R13.1@74.475,114.5 75.53,114.5 75.775,114.255 U2.1@77.875,114.255 U2.1@78.025,114.255
NetC3x_2: C3x.2 RX3A.2 RX3B.2 RX3g.2 | length 11.6
  Top Layer w0.254: RX3g.2@72.34,122.65 72.39,122.6 C3x.2@74.24,122.6 74.24,127.35 RX3A.2@75.64,128.75 RX3B.2@78.607,128.75
NetC3y_1: C3y.1 R83.1 U10.1 | length 19.3
  Top Layer w0.254: U10.1@18.35,54.945 20.6,54.945 20.845,54.7 R83.1@21.9,54.7 21.9,51.818 28.918,44.8 C3y.1@28.918,41.974
NetC3y_2: C3y.2 RY3A.2 RY3B.2 RY3g.2 | length 9.2
  Top Layer w0.254: RY3B.2@24.696,36.724 RY3A.2@27.663,36.724 28.918,37.979 C3y.2@28.918,40.574 ; C3y.2@28.968,40.524 RY3g.2@30.818,40.524
NetC4x_1: C4x.1 R15.1 U2.7 | length 11.5
  Top Layer w0.254: U2.7@82.925,112.985 84.56,112.985 84.775,113.2 R15.1@86.125,113.2 ; C4x.1@86.04,121.2 86.125,121.115 R15.1@86.125,113.2 ; R15.1@86.275,113.2 R15.1@86.125,113.2
NetC4x_2: C4x.2 RX4A.2 RX4B.2 RX4g.2 | length 11.5
  Top Layer w0.254: RX4B.2@81.573,128.75 RX4A.2@84.54,128.75 86,127.29 86,122.74 C4x.2@86.09,122.65 ; C4x.2@86.04,122.6 C4x.2@86.09,122.65 ; RX4g.2@87.79,122.65 C4x.2@86.09,122.65
NetC4y_1: C4y.1 R81.1 U10.7 | length 20.7
  Top Layer w0.254: U10.7@13.45,56.215 11.815,56.215 11.6,56 R81.1@10.1,56 10.1,45.35 13.45,42 C4y.1@15.368,42
NetC4y_2: C4y.2 RY4A.2 RY4B.2 RY4g.2 | length 9.3
  Top Layer w0.254: C4y.2@15.368,40.524 15.418,40.574 17.118,40.574 17.118,38.369 RY4A.2@18.763,36.724 RY4B.2@21.73,36.724
NetC5y_1: C5y.1 R25.1 U4.1 | length 18.6
  Top Layer w0.254: C5y.1@122.781,42.074 124.381,42.074 126.769,44.462 R25.1@126.769,54.415 125.645,54.415 125.4,54.66 U4.1@123.219,54.66